# Altium PCB PCB_PCI_mez_to_MB.PcbDoc
Units mm, origin at the board's own origin, x right, y up, seen from the top; angles counter-clockwise.
Board outline 42 x 29 mm, 2 copper layers (Top Layer, Bottom Layer); 3 components, 16 nets, 32 pads, 0 vias.
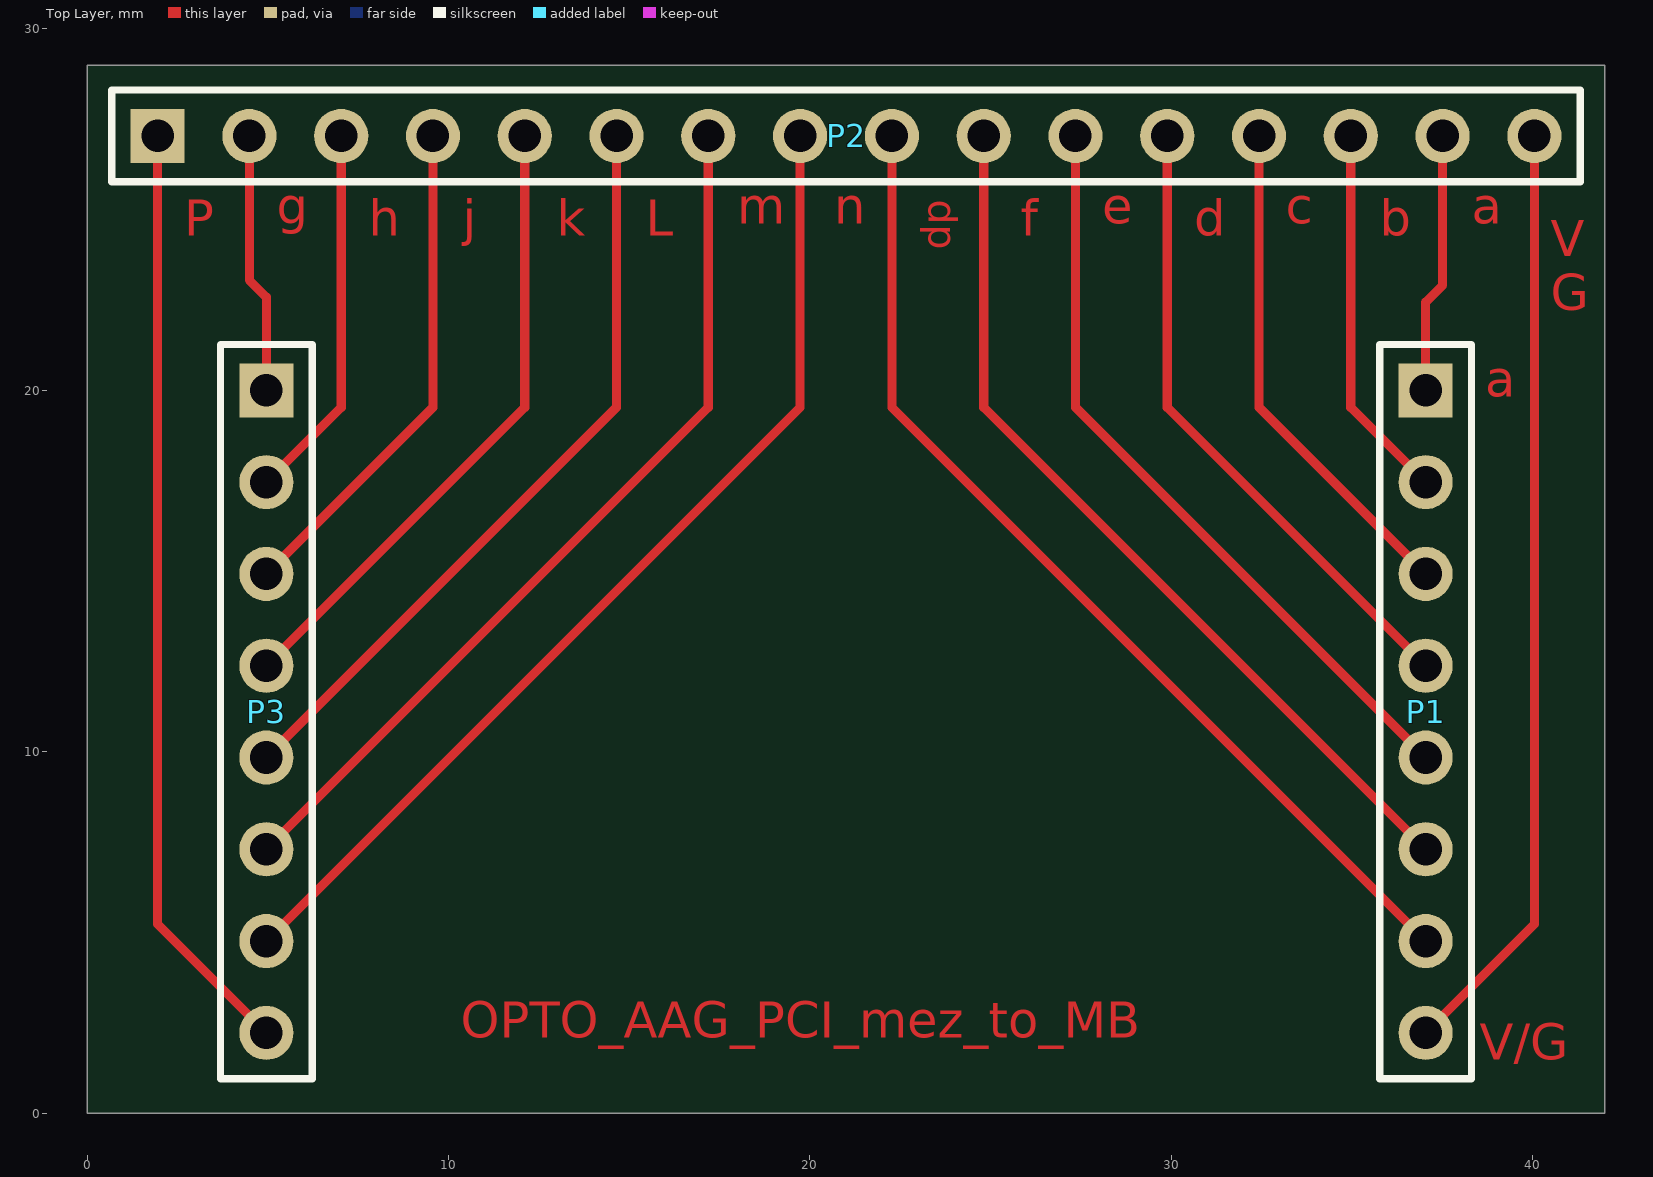
[diagram p0: Top Layer view]
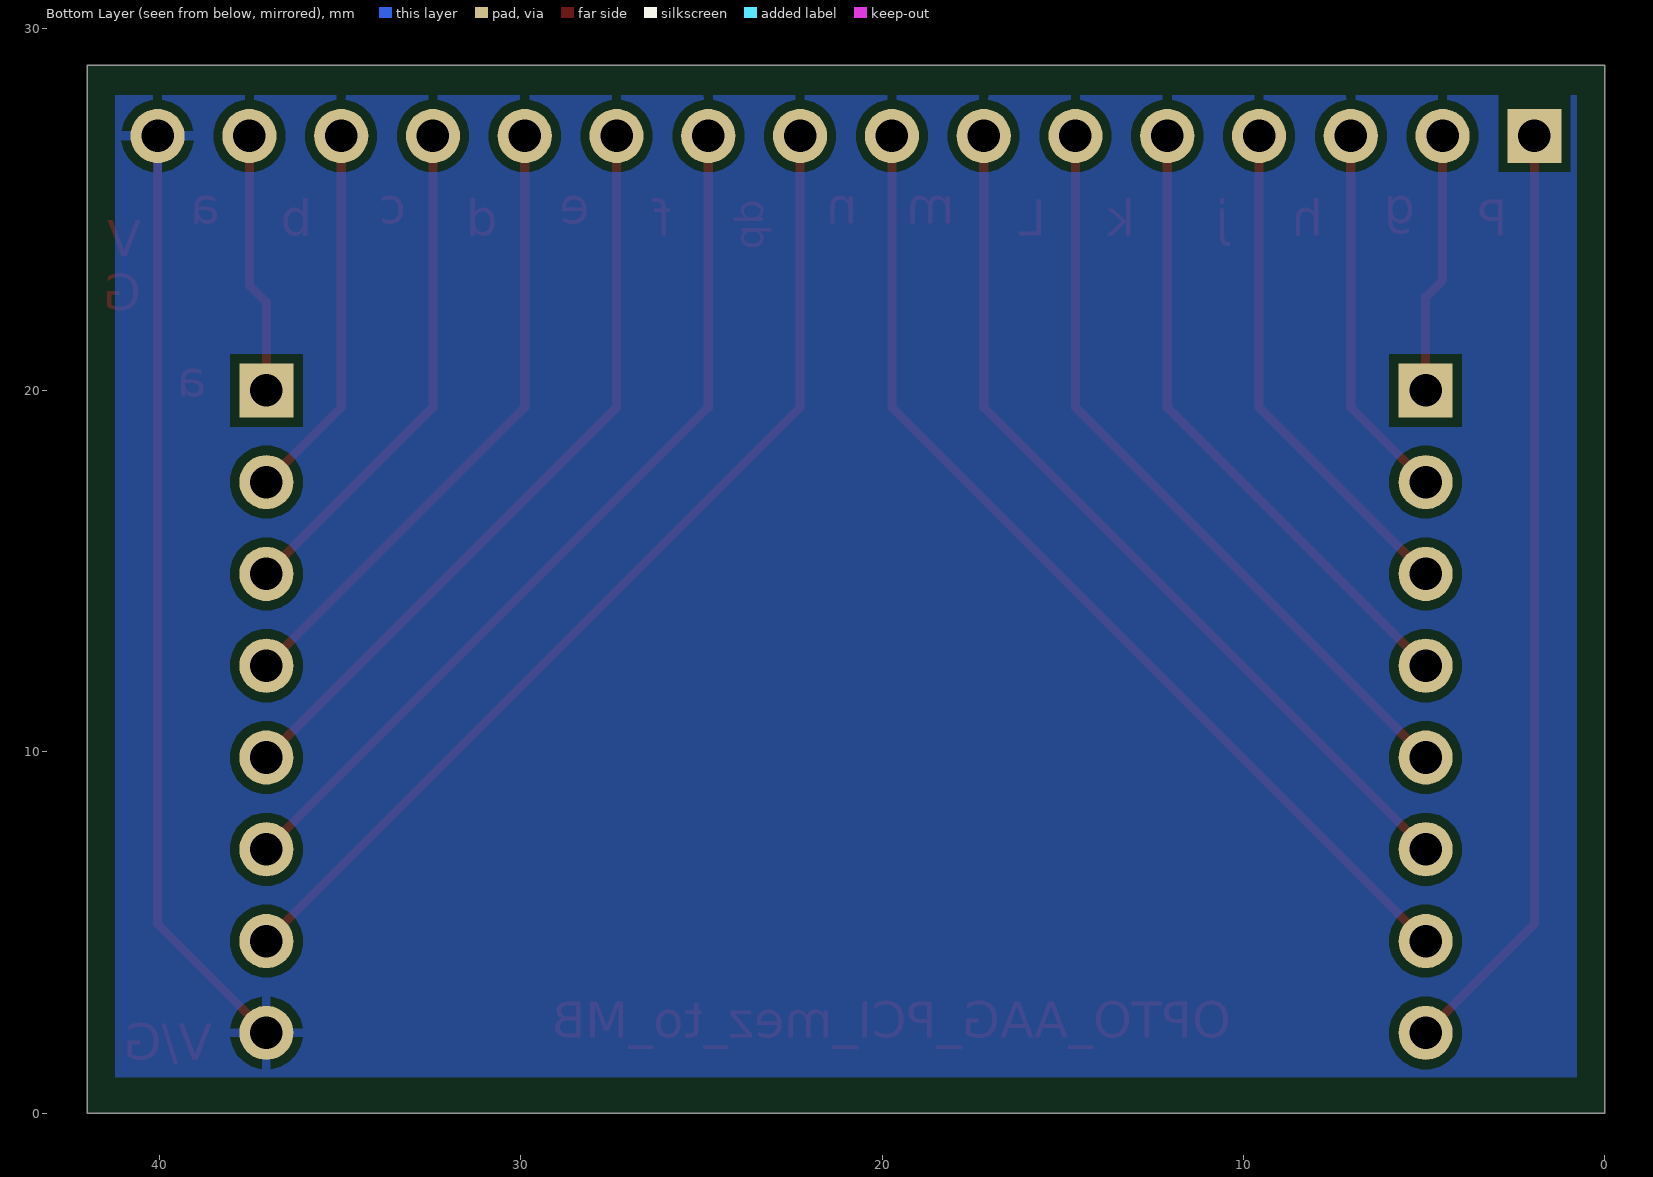
[diagram p1: Bottom Layer view, seen from below]

## Layer stack, top to bottom
Top Solder: solder mask 0.0102, Solder Resist, Dk 3.5
Top Layer: signal copper 0.0356
Dielectric 1: dielectric 0.32, FR-4, Dk 4.8
Bottom Layer: signal copper 0.0356
Bottom Solder: solder mask 0.0102, Solder Resist, Dk 3.5

## Board outline
0,0 42,0 42,29 0,29

## Design rules (kind name [scope] priority, off if disabled: settings)
BoardOutlineClearance [OnLayer('Multi-Layer')] p1: gap=0.254 ignorepadtopadclearanceinfootprint=FALSE except(0: Arc-SplitContinuation Track-SplitContinuation SMDPad-SplitContinuation THPad-SplitContinuation Via-SplitContinuation Fill-SplitContinuation Poly-SplitContinuation Region-SplitContinuation Text-SplitContinuation; 0.4: Arc-OutlineEdge Track-OutlineEdge SMDPad-OutlineEdge THPad-OutlineEdge Via-OutlineEdge Fill-OutlineEdge Poly-OutlineEdge Region-OutlineEdge Text-OutlineEdge)
Clearance [All] p1: gap=0.125 ignorepadtopadclearanceinfootprint=FALSE except(0.2: Arc-Fill Arc-Poly Track-Fill Track-Poly SMDPad-Fill SMDPad-Poly THPad-Fill THPad-Poly Via-Fill Via-Poly Fill-Fill Fill-Poly Poly-Poly Poly-Region Poly-Text; 0.25: Arc-Hole Track-Hole SMDPad-Hole THPad-Hole Via-Hole Fill-Hole Poly-Hole Region-Hole Text-Hole) // Standart
DiffPairsRouting [All] p1: maxlimit=0.254 minlimit=0.127 mostfreqgap=0.13 toplayer_minwidth=0.127 toplayer_maxwidth=0.381 toplayer_prefwidth=0.37 bottomlayer_minwidth=0.127 bottomlayer_maxwidth=0.381 bottomlayer_prefwidth=0.37 maxuncoupledlength=12.7
HoleSize [All] p1: absolutevalues=TRUE maxlimit=5 minlimit=0.3 maxpercent=80.000 minpercent=20.000
MinimumSolderMaskSliver [All] p1: minsoldermaskwidth=0.1
PlaneClearance "PlaneClearance-1 1/2 Oz" [All] p1: clearance=0.2 // Standart
PlaneConnect "TermalConnect-1 1/2 Oz" [All] p1: planeconnectstyle=Relief reliefexpansion=0.2 reliefentries=4 reliefconductorwidth=0.2 reliefairgap=0.2 // Standart
PolygonConnect "PolygonConnect-1 1/2 Oz" [All] p1: thpad.connectstyle=Relief thpad.reliefconductorwidth=0.15 thpad.reliefentries=4 thpad.polygonreliefangle="90 Angle" thpad.airgapwidth=0.2 smdpad.connectstyle=Relief smdpad.reliefconductorwidth=0.2 smdpad.reliefentries=4 smdpad.polygonreliefangle="90 Angle" smdpad.airgapwidth=0.2 via.connectstyle=Direct via.reliefconductorwidth=0.254 via.reliefentries=4 via.polygonreliefangle="90 Angle" via.airgapwidth=0.254 // Standart
RoutingVias [All] p1: holewidth=0.3 width=1.27 viastyle="Through Hole" minholewidth=0.3 minwidth=0.6 maxholewidth=0.711 maxwidth=1.27
SilkToSilkClearance [All] p1: silktosilkclearance=0
SilkToSolderMaskClearance [IsPad] p1: minsilkscreentomaskgap=0 clearancetoexposedcopper=TRUE
SolderMaskExpansion [All] p1: expansion=0.102 istentingtop=FALSE
UnRoutedNet [All] p1: checkbadconnections=TRUE
Width [All] p1: maxlimit=2.5 minlimit=0.125 preferedwidth=0.37
22 further rules are at their usual default settings.

## Components (designator, comment, footprint, x,y, rotation, side; value= is the part's Value field where it differs from the comment)
P1 "Header 8" HDR1X8 37.04,20 r270 top
P2 "Header 16" HDR1X16 1.95,27.04 r0 top
P3 "Header 8" HDR1X8 4.96,20 r270 top

## Footprints (in the part's own frame and the unit in brackets; to place one, negate y for a bottom-side part, rotate by r counter-clockwise, add the part's x,y. Pads: shape width x height; smd on the part's side, far side on the other; paste and mask are expansions set on the pad)
HDR1X8 [mm] "Connector; Header; 8 Position"
  rect 1.5x1.5 hole 0.9: 1(0,0)
  round 1.5 hole 0.9: 2(2.54,0) 3(5.08,0) 4(7.62,0) 5(10.16,0) 6(12.7,0) 7(15.24,0) 8(17.78,0)
  silkscreen extent -1.27,-1.27 19.05,1.27
HDR1X16 [mm] "Connector; Header; 16 Position"
  rect 1.5x1.5 hole 0.9: 1(0,0)
  round 1.5 hole 0.9: 2(2.54,0) 3(5.08,0) 4(7.62,0) 5(10.16,0) 6(12.7,0) 7(15.24,0) 8(17.78,0) 9(20.32,0) 10(22.86,0) 11(25.4,0) 12(27.94,0) 13(30.48,0) 14(33.02,0) 15(35.56,0) 16(38.1,0)
  silkscreen extent -1.27,-1.27 39.37,1.27

## Part data
P1 P3: "Header, 8-Pin", LatestRevisionDate=17-Jul-2002, LatestRevisionNote="Re-released for DXP Platform.", Publisher="Altium Limited"
P2: "Header, 16-Pin", LatestRevisionDate=17-Jul-2002, LatestRevisionNote="Re-released for DXP Platform.", Publisher="Altium Limited"

## Nets (pads, with @x,y where several pads share a name; then routed paths per layer and width w, separated by ;. In a path a pad name is that pad's centre, name@x,y a point inside that pad or via, vN(x,y) a via of type N, cw(c..) or ccw(c..) an arc to the next point about the centre after c; other vN are vias at no path point)
a: P1.1 P2.15 | length 7.2
  Top Layer w0.254: P1.1 37.04,22.44 37.51,22.91 P2.15
b: P1.2 P2.14 | length 10.4
  Top Layer w0.254: P2.14 34.97,19.53 P1.2
c: P1.3 P2.13 | length 14
  Top Layer w0.254: P2.13 32.43,19.53 P1.3
d: P1.4 P2.12 | length 17.6
  Top Layer w0.254: P2.12 29.89,19.53 P1.4
dp: P1.7 P2.9 | length 28.4
  Top Layer w0.254: P2.9 22.27,19.53 P1.7
e: P1.5 P2.11 | length 21.2
  Top Layer w0.254: P2.11 27.35,19.53 P1.5
f: P1.6 P2.10 | length 24.8
  Top Layer w0.254: P2.10 24.81,19.53 P1.6
g: P2.2 P3.1 | length 7.2
  Top Layer w0.254: P2.2 4.49,23.05 4.96,22.58 P3.1
GND: P1.8 P2.16 | length 26.1
  Top Layer w0.254: P1.8 40.05,5.23 P2.16
h: P2.3 P3.2 | length 10.4
  Top Layer w0.254: P3.2 7.03,19.53 P2.3
j: P2.4 P3.3 | length 14
  Top Layer w0.254: P3.3 9.57,19.53 P2.4
k: P2.5 P3.4 | length 17.6
  Top Layer w0.254: P3.4 12.11,19.53 P2.5
L: P2.6 P3.5 | length 21.2
  Top Layer w0.254: P3.5 14.65,19.53 P2.6
m: P2.7 P3.6 | length 24.8
  Top Layer w0.254: P3.6 17.19,19.53 P2.7
n: P2.8 P3.7 | length 28.4
  Top Layer w0.254: P3.7 19.73,19.53 P2.8
p: P2.1 P3.8 | length 26.1
  Top Layer w0.254: P2.1 1.95,5.23 P3.8

## Polygon pours and split planes (outlines as drawn)
GND on Bottom Layer "GND_L02_P001" (solid, pour order 1): 41.22,28.17 41.22,0.99 0.78,0.99 0.78,28.17

## Other copper
Top Layer:
  text "g" at 5.254,24.614 h1
  text "m" at 17.994,24.614 h1
  text "n" at 20.674,24.614 h1
  text "e" at 28.094,24.614 h1
  text "c" at 33.174,24.614 h1
  text "a" at 38.314,24.614 h1
  text "P" at 2.694,24.281 h1
  text "h" at 7.794,24.281 h1
  text "j" at 10.394,24.281 h1
  text "k" at 12.994,24.281 h1
  text "L" at 15.454,24.281 h1
  text "f" at 25.834,24.281 h1
  text "d" at 30.634,24.281 h1
  text "b" at 35.774,24.281 h1
  text "dp" at 23.879,23.894 h0.8 r90
  text "V / G" at 40.5,22.217 h1
  text "a" at 38.694,19.829 h1
  text "OPTO_AAG_PCI_mez_to_MB" at 10.337,2.081 h1
  text "V/G" at 38.54,1.48 h1

## Silkscreen, mask and mechanical layers (free items; w line width, h text height)
Top Solder:
  rectangle: 9.98,1.62 32.04,3.42
  rectangle: 40.52,22.2 41.66,25.44
  rectangle: 38.12,24.42 39.16,25.48
  rectangle: 35.5,24.1 36.6,25.42
  rectangle: 32.92,24.42 34,25.48
  rectangle: 30.44,24.1 31.48,25.5
  rectangle: 27.88,24.44 29.04,25.46
  rectangle: 25.7,24.1 26.52,25.48
  rectangle: 22.74,23.66 24.58,25.46
  rectangle: 20.52,24.42 21.54,25.44
  rectangle: 17.82,24.46 18.84,25.44
  rectangle: 15.26,24.12 16.26,25.44
  rectangle: 12.78,23.94 13.74,25.4
  rectangle: 10.22,23.78 11.1,25.46
  rectangle: 7.58,24.06 8.68,25.44
  rectangle: 5.04,24.1 6.22,25.44
  rectangle: 2.46,24.02 3.62,25.46
  rectangle: 38.54,19.54 39.62,20.72
  rectangle: 38.56,1.5 41.6,2.96
Mechanical 1:
  the board outline again, w0.254